# Altium PCB G030F6.PcbDoc
Units mm, origin at the board's own origin, x right, y up, seen from the top; angles counter-clockwise.
Board outline 50.7 x 25.8 mm, 2 copper layers (Top Layer, Bottom Layer); 19 components, 23 nets, 83 pads, 0 vias.
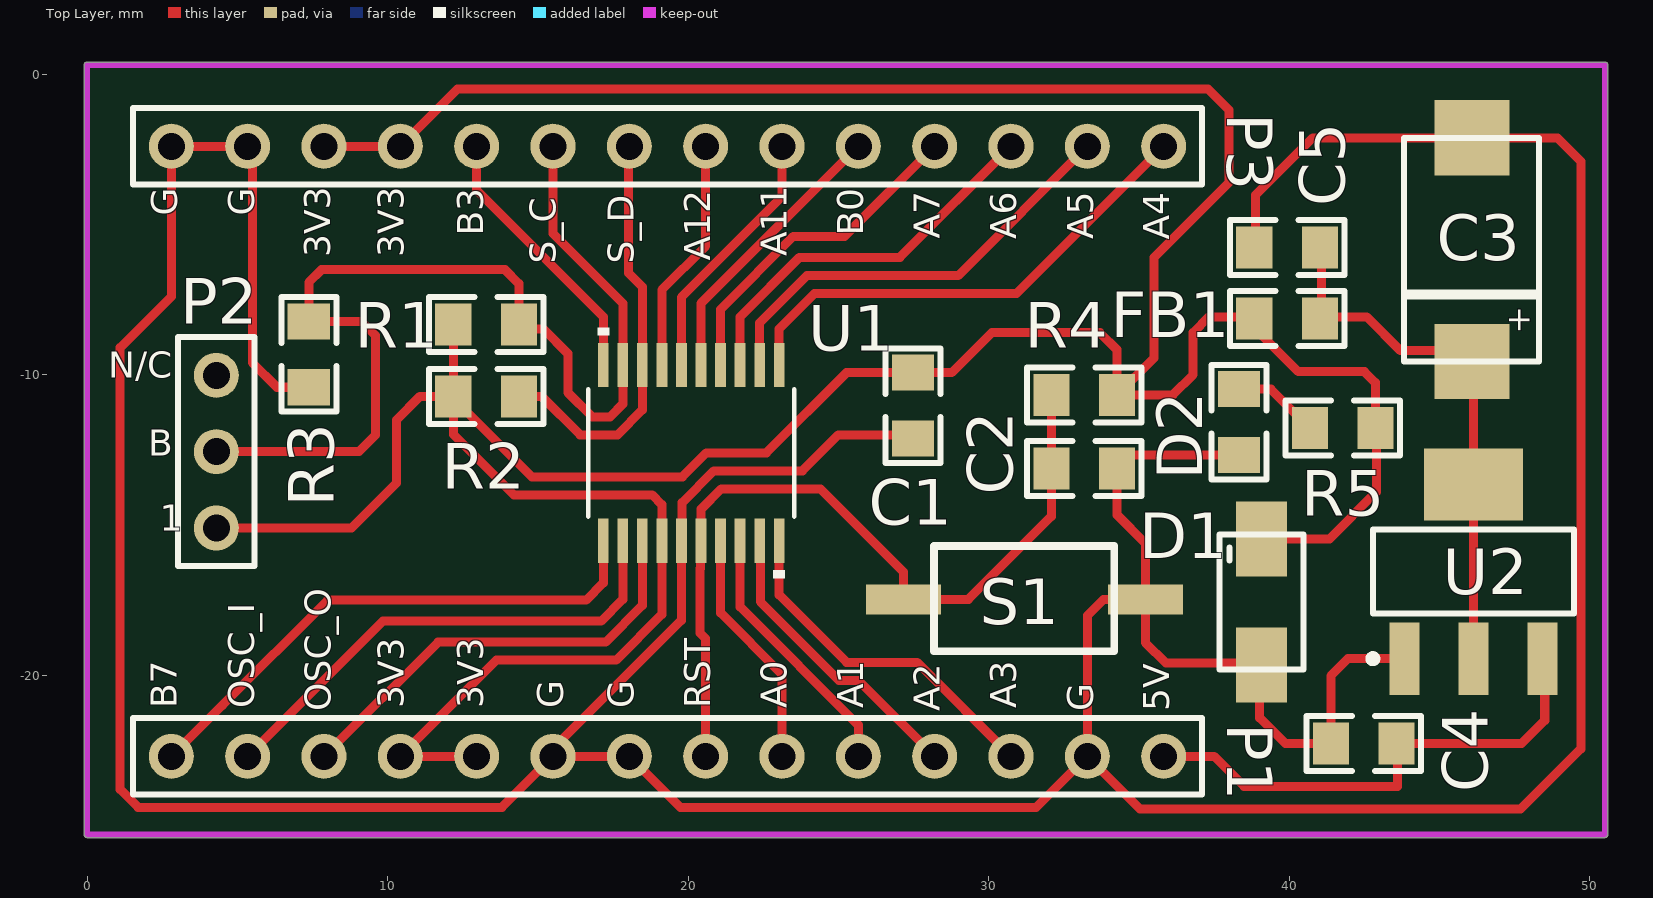
[diagram p0: Top Layer view]
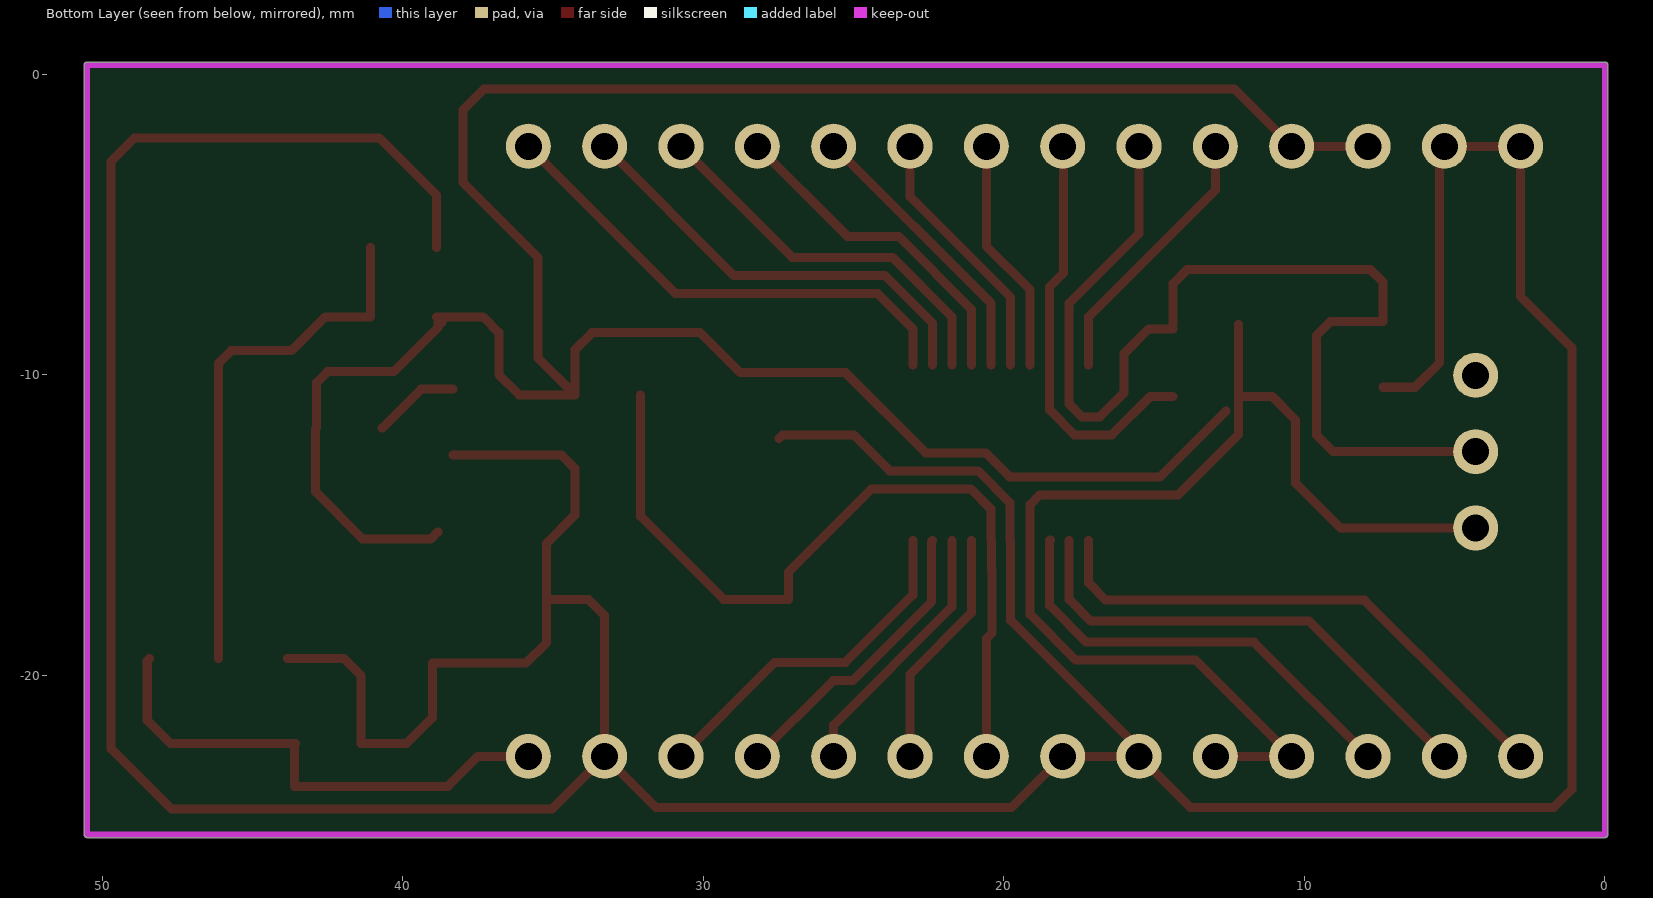
[diagram p1: Bottom Layer view, seen from below]

## Layer stack, top to bottom
Top Solder: solder mask 0.0102, Solder Resist, Dk 3.5
Top Layer: signal copper 0.0356
Dielectric 1: dielectric 0.32, FR-4, Dk 4.8
Bottom Layer: signal copper 0.0356
Bottom Solder: solder mask 0.0102, Solder Resist, Dk 3.5

## Board outline
0,-25.4 cw(c0,-25.3) -0.1,-25.3 -0.1,0.3 cw(c0,0.3) 0,0.4 50.5,0.4 cw(c50.5,0.3) 50.6,0.3 50.6,-25.3 cw(c50.5,-25.3) 50.5,-25.4

## Design rules (kind name [scope] priority, off if disabled: settings)
Clearance [All] p1: gap=0.3 ignorepadtopadclearanceinfootprint=FALSE except(0: Arc-Hole Track-Hole SMDPad-Hole THPad-Hole Via-Hole Fill-Hole Poly-Hole Region-Hole Text-Hole)
PolygonConnect [All] p1: connectstyle=Relief reliefconductorwidth=0.254 reliefentries=4 polygonreliefangle="90 Angle" airgapwidth=0.254
RoutingVias [All] p1: holewidth=0.711 width=1.27 viastyle="Through Hole" minholewidth=0.711 minwidth=1.27 maxholewidth=0.711 maxwidth=1.27
SolderMaskExpansion [All] p1: expansion=0.102
Width [All] p1: maxlimit=1 minlimit=0.3 preferedwidth=0.5
30 further rules are at their usual default settings.

## Components (designator, comment, footprint, x,y, rotation, side; value= is the part's Value field where it differs from the comment)
C1 "100nF" SMD_805 27.5,-11 r180 top
C2 "100nF" SMD_805 33.149,-13.1 r270 top
C3 "100uF" CAP_SMD_D 46.1,-5.8 r270 top
C4 "100nF" SMD_805 42.5,-22.3 r90 top
C5 "100nF" SMD_805 39.951,-5.8 r90 top
D1 "SMBJ 5V" tvs 39.1,-17.5 r0 top
D2 "LED0" SMD_805 38.3,-11.6 r0 top
FB1 "FERRIT" SMD_805 39.951,-8.15 r90 top
P1 "Header 14" HDR1X14 2.8,-22.7 r0 top
P2 "Header 3" HDR1X3 4.3,-15.1 r90 top
P3 "Header 14" HDR1X14 2.8,-2.4 r0 top
R1 "10K" SMD_805 13.249,-8.309 r270 top
R2 "10K" SMD_805 13.249,-10.7 r270 top
R3 "10K" SMD_805 7.4,-9.3 r180 top
R4 "10K" SMD_805 33.2,-10.7 r90 top
R5 "1K" SMD_805 41.8,-11.8 r90 top
S1 "SW-PB" smd_button 31.2,-17.3 r0 top
U1 "STM32G030F6Px" TSSOP20 20.1,-12.6 r90 top
U2 "AMS1117-3.3" SOT223 46.1,-16.6 r0 top

## Footprints (in the part's own frame and the unit in brackets; to place one, negate y for a bottom-side part, rotate by r counter-clockwise, add the part's x,y. Pads: shape width x height; smd on the part's side, far side on the other; paste and mask are expansions set on the pad)
CAP_SMD_D [mm]
  rect 2.5x2.5 smd: 1(3.767,-0.025) 2(-3.683,-0.025)
  silkscreen extent -3.68,-2.29 3.77,2.21, body extent -2.97,-1.63 3.02,1.58, height 2.5
HDR1X3 [mm] "Connector; Header; 3 Position"
  round 1.5 hole 0.9: 1(0,0) 2(2.54,0) 3(5.08,0)
  silkscreen extent -1.27,-1.27 6.35,1.27
HDR1X14 [mm] "Connector; Header; 14 Position"
  round 1.5 hole 0.9: 1(0,0) 2(2.54,0) 3(5.08,0) 4(7.62,0) 5(10.16,0) 6(12.7,0) 7(15.24,0) 8(17.78,0) 9(20.32,0) 10(22.86,0) 11(25.4,0) 12(27.94,0) 13(30.48,0) 14(33.02,0)
  silkscreen extent -1.27,-1.27 34.29,1.27
SMD_805 [mm]
  rect 1.4x1.2 smd: 1(0.025,1.118) 2(0.025,-1.067)
  silkscreen extent -0.89,-1.88 0.94,1.93, body extent -0.66,-1.07 0.71,1.14, height 1.1
smd_button [mm]
  rect 2.5x1 smd: 1(4.013,-0.178) 2(-4.039,-0.178)
  silkscreen extent -3.02,-1.9 2.98,1.6, body extent -4,-1.9 4,1.6, height 5.5
SOT223 [mm]
  rect 1x2.4 smd: 1(-2.269,-2.85) 2(0.031,-2.85) 3(2.331,-2.85)
  rect 3.3x2.4 smd: 2(0.031,2.95)
  silkscreen extent -3.44,-2.97 3.38,1.45, body extent -3.21,-3.44 3.27,3.54, height 1.64
TSSOP20 [mil] "STM32 package, TSSOP20, 6.4 x 4.4mm"
  rect 58x14 smd paste+0 mask+0: 1(-115,115.16) 2(-115,89.57) 3(-115,63.98) 4(-115,38.39) 5(-115,12.8) 6(-115,-12.8) 7(-115,-38.39) 8(-115,-63.98) 9(-115,-89.57) 10(-115,-115.16) 11(115,-115.16) 12(115,-89.57) 13(115,-63.98) 14(115,-38.39) 15(115,-12.8) 16(115,12.8) 17(115,38.39) 18(115,63.98) 19(115,89.57) 20(115,115.16)
  silkscreen extent -164,-135 164,135, body extent -130,-130 130,130, height 47
tvs [mm]
  rect 1.7x2.5 smd: 1(-0.025,-2.159) 2(-0.025,2.032)
  silkscreen extent -1.42,-2.32 1.38,2.18, body extent -1.5,-2.76 1.42,2.74, height 2.23

## Part data
C1 C2 C4 C5: library part Cap, "Capacitor"
C3: library part "Cap Pol1", "Polarized Capacitor (Radial)"
D1: library part "Diode 11DQ03", "Schottky Rectifier"
D2: "Typical INFRARED GaAs LED"
FB1: library part "Fuse 1", "Fuse"
P1 P3: "Header, 14-Pin"
P2: "Header, 3-Pin"
R1 R2 R3 R4 R5: library part Res1, "Resistor"
S1: "Switch"
U1: "The STM32G030x6/x8 mainstream microcontrollers are based on high-performance Arm® Cortex®-M0+ 32-bit RISC core operating at up to 64 MHz frequency.  / 32K Flash and 8K RAM with 20pin TSSOP 6.4x4.4mm package"
U2: library part LD1117DT33

## Nets (pads, with @x,y where several pads share a name; then routed paths per layer and width w, separated by ;. In a path a pad name is that pad's centre, name@x,y a point inside that pad or via, vN(x,y) a via of type N, cw(c..) or ccw(c..) an arc to the next point about the centre after c; other vN are vias at no path point)
3V3: C1.2 D1.2 FB1.1 P1.4 P1.5 P2.1 P3.3 P3.4 R1.2 R2.2 R4.2 R5.2 U1.4 | length 128.2
  Top Layer w0.3: P2.1 8.8,-15.1 10.3,-13.6 10.3,-11.5 11.075,-10.725 R2.2 ; P3.3 P3.4 12.32,-0.5 37.3,-0.5 38,-1.2 38,-3.6 35.5,-6.1 35.5,-9.441 R4.2 ; R1.2 R2.2 ; R2.2@12.6,-11.2 14.8,-13.4 19.803,-13.4 20.603,-12.6 22.6,-12.6 25.267,-9.933 C1.2 28.767,-9.933 30.1,-8.6 33.7,-8.6 34.267,-9.167 R4.2 ; P1.5 P1.4 13.62,-19.5 17.6,-19.5 19.125,-17.975 U1.4 19.125,-14.325 18.8,-14 14.2,-14 12.182,-11.982 R2.2 ; FB1.1@38.7,-8.255 38.88,-8.075 37.325,-8.075 36.8,-8.6 36.8,-10 36.125,-10.675 R4.2 ; D1.2@38.833,-15.227 D1.2 41.332,-15.468 42.9,-13.9 42.9,-11.808 R5.2 42.867,-10.267 42.5,-9.9 40.3,-9.9 38.833,-8.433 FB1.1
5V0: C4.2 P1.14 U2.3 | length 17
  Top Layer w0.3: P1.14 37.5,-22.7 38.5,-23.7 43.6,-23.7 43.6,-22.308 C4.2 47.725,-22.275 48.5,-21.5 48.5,-19.519 U2.3
GND: C1.1 C2.1 C3.2 C4.1 C5.1 D1.1 D2.2 P1.6 P1.7 P1.13 P3.1 P3.2 R3.1 S1.1 U1.5 U2.1 | length 169.6
  Top Layer w0.3: R3.1 6.318,-10.418 5.5,-9.6 5.5,-2.56 P3.2 P3.1 2.8,-7.4 1.1,-9.1 1.1,-23.8 1.7,-24.4 13.8,-24.4 P1.6 ; C1.1 27.357,-12 25,-12 23.8,-13.2 20.851,-13.2 19.797,-14.254 19.797,-15.521 U1.5 19.775,-18.174 15.5,-22.449 P1.6 ; D2.2 34.725,-12.667 C2.1 34.267,-14.667 35.213,-15.613 S1.1 ; C5.1@38.88,-5.775 38.88,-4.02 40.783,-2.117 C3.2 48.917,-2.117 49.7,-2.9 49.7,-22.45 47.7,-24.45 35.03,-24.45 P1.13 ; U2.1 41.95,-19.45 41.382,-20.018 C4.1 39.875,-22.275 39.016,-21.416 39.016,-19.6 35.9,-19.6 35.213,-18.913 S1.1 ; P1.6 P1.7 19.74,-24.4 31.58,-24.4 P1.13 ; P1.13 33.28,-18.02 33.822,-17.478 S1.1
NetC3_1: C3.1 C5.2 FB1.2 U2.2 | length 17.8
  Top Layer w0.3: C5.2@41.065,-5.775 41.065,-8.075 42.575,-8.075 43.7,-9.2 45.708,-9.2 C3.1 46.131,-9.623 46.131,-13.65 U2.2@46.131,-19.45
NetD2_1: D2.1 R5.1 | length 2.9
  Top Layer w0.3: D2.1 39.39,-10.482 R5.1
OSC32_IN: P1.2 U1.2 | length 16.6
  Top Layer w0.3: P1.2 9.84,-18.2 17.1,-18.2 17.825,-17.475 U1.2
OSC32_OUT: P1.3 U1.3 | length 14.9
  Top Layer w0.3: P1.3 11.68,-18.9 17.249,-18.9 18.475,-17.674 U1.3 U1.3@18.453,-15.499
PA0: P1.9 U1.7 | length 8
  Top Layer w0.3: U1.7 21.075,-17.924 23.12,-19.969 P1.9
PA1: P1.10 U1.8 | length 8.8
  Top Layer w0.3: U1.8 21.725,-17.725 25.66,-21.66 P1.10
PA2: P1.11 U1.9 | length 10
  Top Layer w0.3: U1.9 22.397,-15.543 22.397,-17.549 25.024,-20.176 25.676,-20.176 P1.11
PA3: P1.12 U1.10 | length 11.7
  Top Layer w0.3: U1.10 23.025,-17.328 25.273,-19.576 27.616,-19.576 P1.12
PA4: P3.14 U1.11 | length 16.5
  Top Layer w0.3: U1.11 23.025,-8.475 24.2,-7.3 30.92,-7.3 P3.14
PA5: P3.13 U1.12 | length 14.7
  Top Layer w0.3: U1.12 22.375,-8.276 23.951,-6.7 28.98,-6.7 P3.13
PA6: P3.12 U1.13 | length 13
  Top Layer w0.3: U1.13 21.725,-8.078 23.703,-6.1 27.04,-6.1 P3.12
PA7: P3.11 U1.14 | length 11.2
  Top Layer w0.3: U1.14 21.075,-7.825 23.5,-5.4 25.2,-5.4 P3.11
PA11: P3.9 U1.16 | length 8.7
  Top Layer w0.3: U1.16 19.775,-7.425 23.12,-4.08 P3.9
PA12: P3.8 U1.17 | length 7.9
  Top Layer w0.3: U1.17 19.125,-7.175 20.58,-5.72 P3.8
PB0: P3.10 U1.15 | length 9.5
  Top Layer w0.3: U1.15 20.425,-7.626 25.651,-2.4 P3.10
PB3: P3.5 U1.20 | length 9
  Top Layer w0.3: P3.5 12.96,-3.86 17.175,-8.075 U1.20
PB7: P1.1 U1.1 | length 18.5
  Top Layer w0.3: P1.1@3.1,-22.7 P1.1 4.5,-21 8,-17.5 16.6,-17.5 17.175,-16.925 U1.1
RESET: C2.2 P1.8 R4.1 S1.2 U1.6 | length 27.5
  Top Layer w0.3: P1.8 20.58,-18.78 20.4,-18.6 20.4,-16.447 20.403,-16.444 20.403,-15.543 U1.6 20.425,-14.475 21.1,-13.8 24.4,-13.8 27.161,-16.561 S1.2 29.322,-17.478 32.082,-14.718 C2.2 R4.1
SWCLK/BOOT: P2.2 P3.6 R1.1 R3.2 U1.19 | length 36.4
  Top Layer w0.3: P2.2 9.04,-12.56 9.6,-12 9.6,-8.7 9.133,-8.233 R3.2 7.375,-6.925 7.8,-6.5 13.9,-6.5 14.367,-6.967 R1.1 ; R1.1@14.367,-8.475 15.175,-8.475 16,-9.3 16,-10.6 16.8,-11.4 17.4,-11.4 17.825,-10.975 U1.19 17.825,-7.625 15.5,-5.3 P3.6
SWDIO: P3.7 R2.1 U1.18 | length 14
  Top Layer w0.3: R2.1 15.125,-10.725 16.4,-12 17.649,-12 18.475,-11.174 U1.18 18.475,-7.075 18.018,-6.618 18.018,-2.422 P3.7
pads on no net: P2.3

## Keep-outs
Keep-Out Layer:
  lines w0.2: 0,-25.3 0,0.3 50.5,0.3 50.5,-25.3 0,-25.3

## Silkscreen, mask and mechanical layers (free items; w line width, h text height)
Top Overlay:
  text "G" at 3.3,-4.716 h1.5 r90
  text "G" at 5.862,-4.716 h1.5 r90
  text "B3" at 13.488,-5.379 h1.5 r90
  text "B0" at 26.118,-5.37 h1.5 r90
  text "A7" at 28.662,-5.474 h1.5 r90
  text "A6" at 31.211,-5.486 h1.5 r90
  text "A5" at 33.77,-5.493 h1.5 r90
  text "A4" at 36.303,-5.503 h1.5 r90
  text "A11" at 23.572,-6.063 h1.5 r90
  text "3V3" at 8.395,-6.1 h1.5 r90
  text "3V3" at 10.841,-6.1 h1.5 r90
  text "A12" at 21.026,-6.213 h1.5 r90
  text "S_C" at 15.9,-6.314 h1.5 r90
  text "S_D" at 18.493,-6.315 h1.5 r90
  text "N/C" at 0.7,-10.4 h1.5
  text "B" at 2.039,-13 h1.5
  text "1" at 2.421,-15.5 h1.5
  text "B7" at 3.284,-21.1 h1.5 r90
  text "OSC_I" at 5.862,-21.1 h1.5 r90
  text "3V3" at 10.841,-21.1 h1.5 r90
  text "3V3" at 13.488,-21.1 h1.5 r90
  text "G" at 16.147,-21.1 h1.5 r90
  text "G" at 18.493,-21.1 h1.5 r90
  text "RST" at 21.039,-21.1 h1.5 r90
  text "A0" at 23.572,-21.1 h1.5 r90
  text "A1" at 26.118,-21.1 h1.5 r90
  text "A3" at 31.211,-21.1 h1.5 r90
  text "OSC_O" at 8.408,-21.2 h1.5 r90
  text "A2" at 28.664,-21.2 h1.5 r90
  text "G" at 33.77,-21.2 h1.5 r90
  text "5V" at 36.3,-21.2 h1.5 r90

## Text inside footprints (layer, text, board x,y; h text height)
C3: Top Overlay "+" at 47.319,-7.73 h0.8 r270
U1: Mechanical 7 "0.26in/6.604mm" at 20.418,-7.317 h0.64 r90; Mechanical 7 "0.026in/0.65mm" at 17.818,-23.014 h0.64 r90; Mechanical 13 "*" at 18.144,-14.772 h1.27 r90